# Altium PCB PCB3.PcbDoc
Units mm, origin at the board's own origin, x right, y up, seen from the top; angles counter-clockwise.
Board outline 147.7 x 93.98 mm, 2 copper layers (Top Layer, Bottom Layer); 30 components, 28 nets, 230 pads, 38 vias.
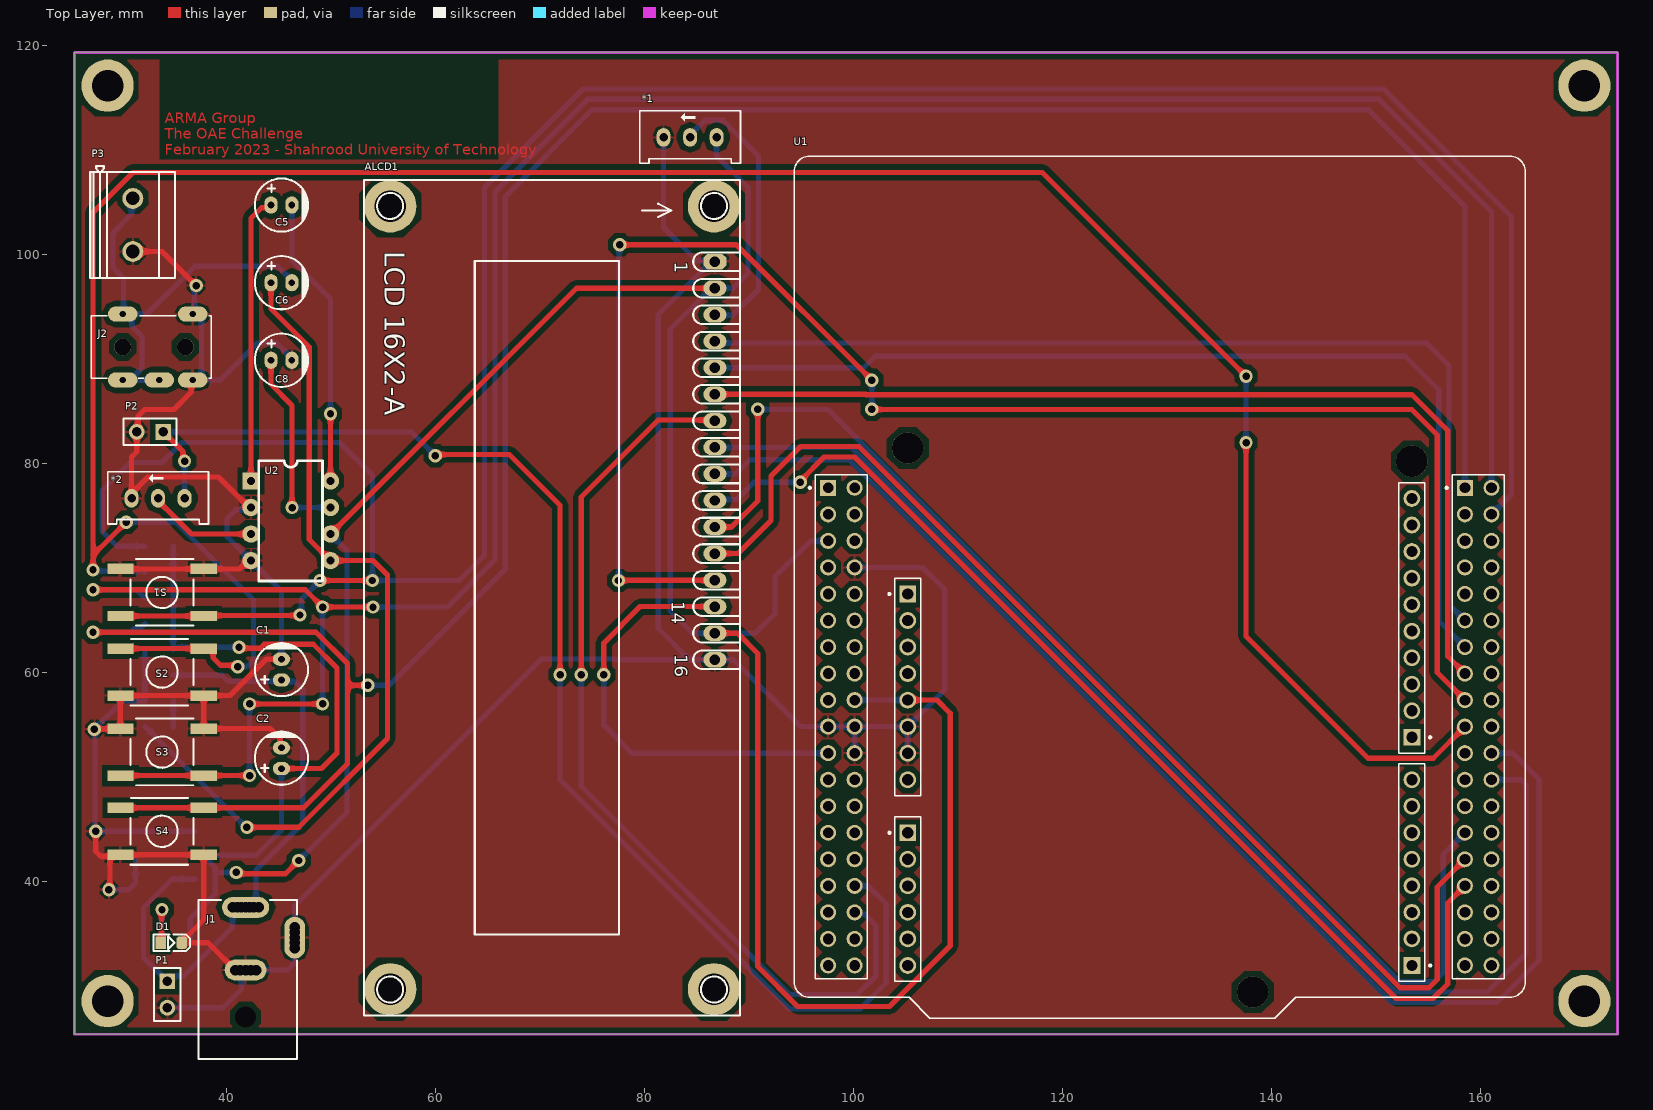
[diagram p0: Top Layer view]
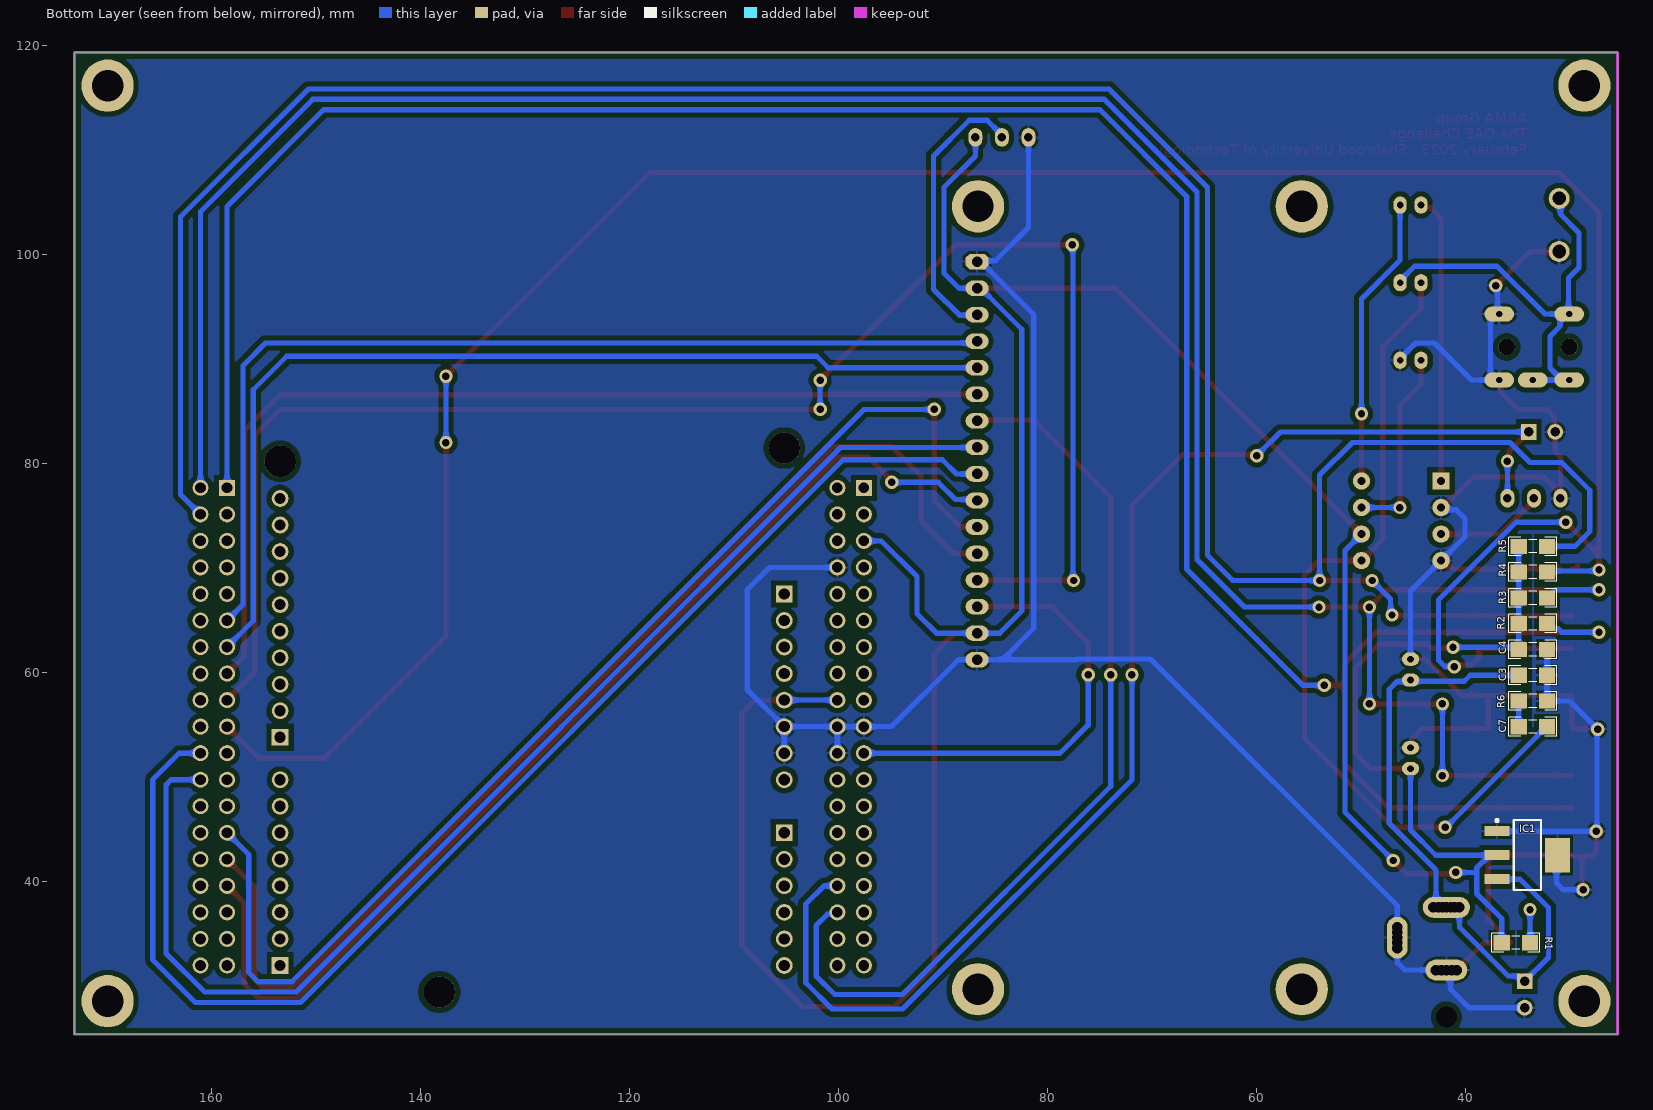
[diagram p1: Bottom Layer view, seen from below]
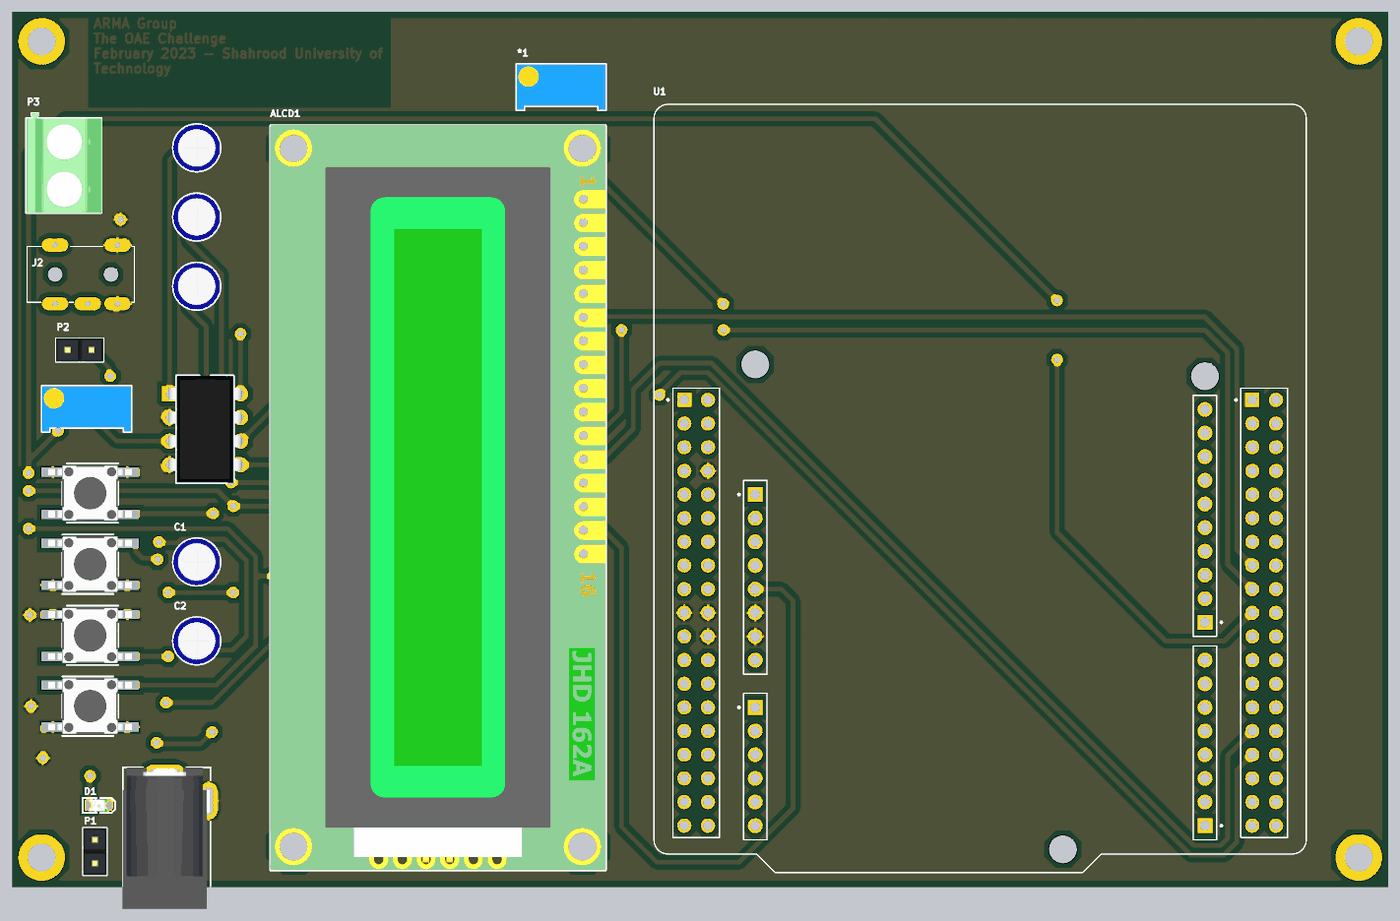
[diagram p2: 3D render of the assembled board from above, using the file's embedded part models]
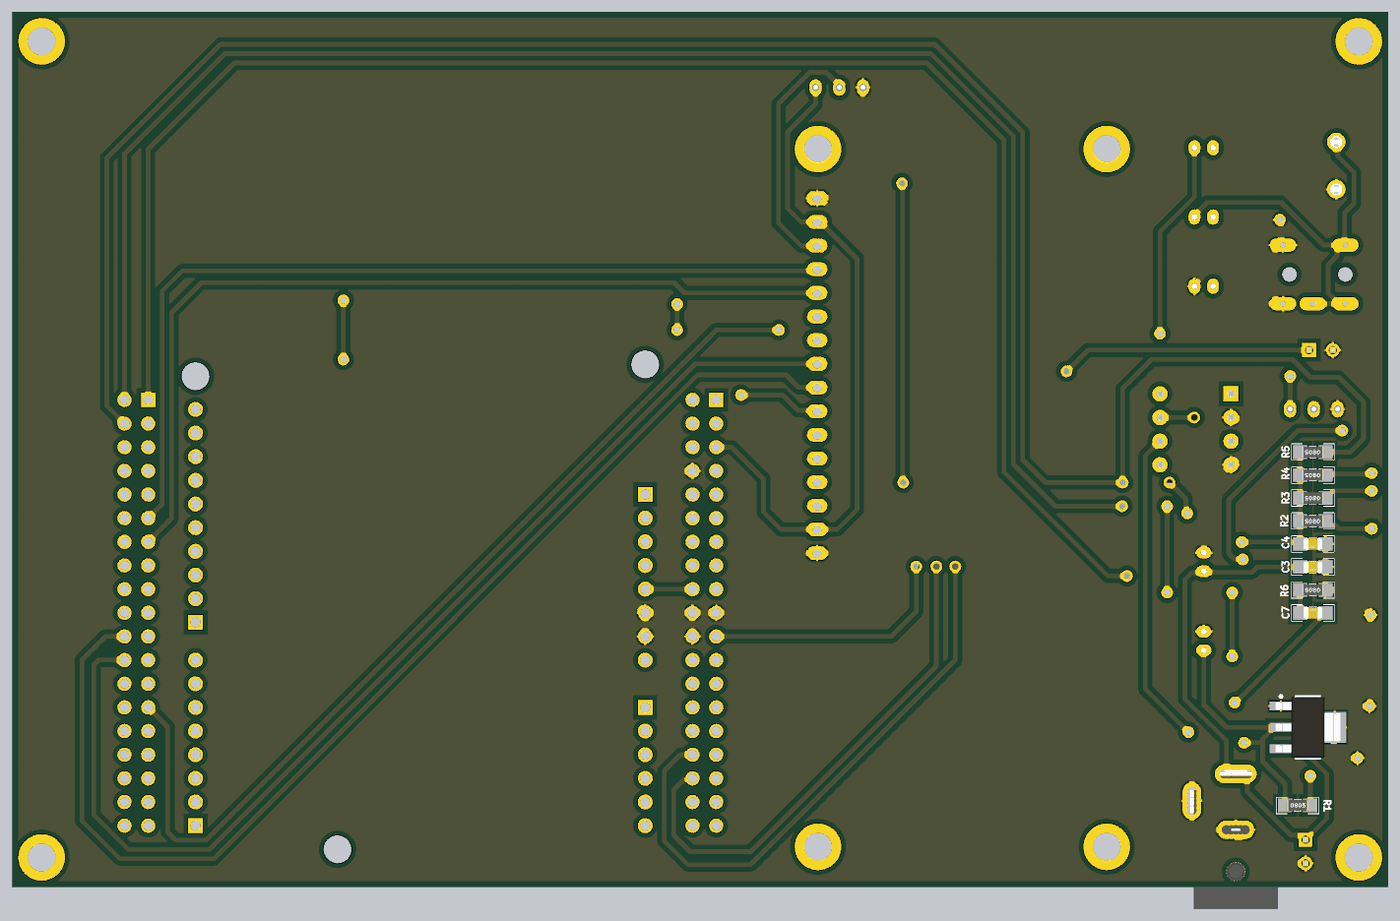
[diagram p3: 3D render of the assembled board from below, using the file's embedded part models]

## Layer stack, top to bottom
Top Solder: solder mask 0.0102, Solder Resist, Dk 3.5
Top Layer: signal copper 0.0356
Dielectric 1: dielectric 0.32, FR-4, Dk 4.8
Bottom Layer: signal copper 0.0356
Bottom Solder: solder mask 0.0102, Solder Resist, Dk 3.5

## Board outline
25.4,25.4 173.101,25.4 173.101,119.38 25.4,119.38

## Design rules (kind name [scope] priority, off if disabled: settings)
Clearance [All] p1: gap=0.5 ignorepadtopadclearanceinfootprint=FALSE
PolygonConnect [All] p1: connectstyle=Relief reliefconductorwidth=0.254 reliefentries=4 polygonreliefangle="90 Angle" airgapwidth=0.254
RoutingVias [All] p1: holewidth=0.711 width=1.27 viastyle="Through Hole" minholewidth=0.711 minwidth=1.27 maxholewidth=0.711 maxwidth=1.27
SolderMaskExpansion [All] p1: expansion=0.102 istentingtop=FALSE
Width [All] p1: maxlimit=0.6 minlimit=0.5 preferedwidth=0.5
30 further rules are at their usual default settings.

## Components (designator, comment, footprint, x,y, rotation, side; value= is the part's Value field where it differs from the comment)
*1 "RES_POT_LIN 10K" 3296W 84.328,111.252 r180 top
*2 "RES_POT_LIN 10K" 3296W 33.401,76.708 r180 top
ALCD1 "LCD" "LCD_2X16 GREEN10mm" 70.401,69.892 r270 top
C1 "100uF" "cap 01" 45.212,60.309 r270 top
C2 "100uF" "cap 01" 45.212,51.832 r270 top
C3 "100nF" CAPC3413X12N 33.506,59.77 r0 bottom
C4 "100nF" CAPC3413X12N 33.506,62.237 r0 bottom
C5 "10uF" "cap 01" 45.212,104.775 r180 top
C6 "250uF" "cap 01" 45.212,97.346 r180 top
C7 "0.05uF or 100nF" CAPC3413X12N 33.506,54.835 r180 bottom
C8 "10uF" "cap 01" 45.212,89.916 r180 top
D1 "LED805GRN" LED0805GRN 34.671,34.163 r0 top
IC1 "IC_AMS1117" SOT223-4N 34.036,42.545 r180 bottom
J1 "Power Jack" "Power Jack" 41.783,23.051 r90 top
J2 "PJ-313" PJ-313 32.766,91.186 r180 top
P1 "Header 2" HDR1X2 34.29,30.48 r270 top
P2 "Header 2" HDR1X2 33.909,83.058 r180 top
P3 "Header 2" CON_MKDSN1,5/2-5,08 30.988,102.87 r270 top
R1 "1K" RESC3413X04N 35.139,34.163 r180 bottom
R2 "10K" RESC3413X04N 33.506,64.705 r0 bottom
R3 "10K" RESC3413X04N 33.506,67.172 r0 bottom
R4 "10K" RESC3413X04N 33.506,69.64 r0 bottom
R5 "10K" RESC3413X04N 33.506,72.107 r0 bottom
R6 "10" RESC3413X04N 33.506,57.303 r0 bottom
S1 "Switch PB" SW-PB 33.782,67.691 r180 top
S2 "Switch PB" SW-PB 33.782,60.071 r0 top
S3 "Switch PB" SW-PB 33.782,52.415 r180 top
S4 "Switch PB" SW-PB 33.782,44.831 r0 top
U1 "NUCLEO-F446RE" MODULE_NUCLEO-F446RE 129.286,68.199 r0 top
U2 "LM386" DIP8 42.291,78.359 r0 top

## Footprints (in the part's own frame and the unit in brackets; to place one, negate y for a bottom-side part, rotate by r counter-clockwise, add the part's x,y. Pads: shape width x height; smd on the part's side, far side on the other; paste and mask are expansions set on the pad)
3296W [mil]
  oval 52x70 hole 32: 1(-100,0) 2(0,0) 3(100,0)
  silkscreen extent -190,-100 190,97, body extent -187,-96 188,94, height 455
"cap 01" [mm]
  oval 1.27x1.651 hole 0.635: 1(1,0) 2(-1,0)
  silkscreen extent -2.55,-2.55 2.55,2.55, body extent -2.53,-2.53 2.53,2.53, height 12.54
CAPC3413X12N [mm] "Chip Capacitor, 2-Leads, Body 3/40x1/30mm, IPC Medium Density-Design:Abbas Basereh"
  rect 1.55x1.45 smd: 1(-1.35,0) 2(1.35,0)
  silkscreen extent -2.29,-0.89 2.29,0.89, body extent -1,-0.63 1,0.62, height 0.78
CON_MKDSN1,5/2-5,08 [mm]
  round 2 hole 1.3: 1(-2.54,0) 2(2.54,0)
  silkscreen extent -5.65,-4.07 5.08,4.03, body extent -5.64,-4.05 5.09,4.05, height 10.03
DIP8 [mil]
  rect 65x65 hole 30: 1(0,0)
  round 65 hole 30: 2(0,-100) 3(0,-200) 4(0,-300) 5(300,-300) 6(300,-200) 7(300,-100) 8(300,0)
  silkscreen extent 30,-377 270,77, body extent -5,-375 305,75, height 165
HDR1X2 [mm] "Connector; Header; 2 Position"
  rect 1.5x1.5 hole 0.9: 1(0,0)
  round 1.5 hole 0.9: 2(2.54,0)
  silkscreen extent -1.27,-1.27 3.81,1.27, body extent -1.27,-1.28 3.81,1.26, height 8.79
"LCD_2X16 GREEN10mm" [mm] "LCD 2x16 Alphanumberic-Designer Abbas Basereh"
  oct 1.5x2.2 hole 1: 1(-29.464,16.3)
  oval 1.5x2.2 hole 1: 2(-26.924,16.3) 3(-24.384,16.3) 4(-21.844,16.3) 5(-19.304,16.3) 6(-16.764,16.3) 7(-14.224,16.3) 8(-11.684,16.3) 9(-9.144,16.3) 10(-6.604,16.3) 11(-4.064,16.3) 12(-1.524,16.3) 13(1.016,16.3) 14(3.556,16.3) 15(6.096,16.3) 16(8.636,16.3)
  round 5 hole 3: ""(-34.756,16.213) ""(-34.756,-14.775) ""(40.174,16.213) ""(40.174,-14.775)
  silkscreen extent -37.3,-17.29 42.7,18.71, body extent -37.35,-17.4 42.8,18.8, height 20.6
LED0805GRN [mm] "LED SMD 0805, GREEN"
  rect 1x1.2 smd paste-2 mask+0.075: 1(-1,0)
  rrect50% 1x1.2 smd paste-2 mask+0.075: 2(1,0)
  Top Layer pour cut-out: -0.5,0.8 0.5,0.8 0.5,-0.8 -0.5,-0.8
  silkscreen extent -1.7,-0.8 1.8,0.8, body extent -1,-0.63 1,0.63, height 0.7
MODULE_NUCLEO-F446RE [mm]
  rect 1.605x1.605 hole 1.07: CN5_1(24.13,-14.37) CN6_1(-24.13,-0.65) CN8_1(-24.13,-23.51) CN9_1(24.13,-36.21)
  round 1.605 hole 1.07: CN5_2(24.13,-11.83) CN5_3(24.13,-9.29) CN5_4(24.13,-6.75) CN5_5(24.13,-4.21) CN5_6(24.13,-1.67) CN5_7(24.13,0.87) CN5_8(24.13,3.41) CN5_9(24.13,5.95) CN5_10(24.13,8.49) CN6_2(-24.13,-3.19) CN6_3(-24.13,-5.73) CN6_4(-24.13,-8.27) CN6_5(-24.13,-10.81) CN6_6(-24.13,-13.35) CN6_7(-24.13,-15.89) CN6_8(-24.13,-18.43) CN8_2(-24.13,-26.05) CN8_3(-24.13,-28.59) CN8_4(-24.13,-31.13) CN8_5(-24.13,-33.67) CN8_6(-24.13,-36.21) CN9_2(24.13,-33.67) CN9_3(24.13,-31.13) CN9_4(24.13,-28.59) CN9_5(24.13,-26.05) CN9_6(24.13,-23.51) CN9_7(24.13,-20.97) CN9_8(24.13,-18.43)
  rect 1.53x1.53 hole 1.02: CN7_1(-31.75,9.51) CN10_1(29.21,9.51)
  round 1.53 hole 1.02: CN7_2(-29.21,9.51) CN7_3(-31.75,6.97) CN7_4(-29.21,6.97) CN7_5(-31.75,4.43) CN7_6(-29.21,4.43) CN7_7(-31.75,1.89) CN7_8(-29.21,1.89) CN7_9(-31.75,-0.65) CN7_10(-29.21,-0.65) CN7_11(-31.75,-3.19) CN7_12(-29.21,-3.19) CN7_13(-31.75,-5.73) CN7_14(-29.21,-5.73) CN7_15(-31.75,-8.27) CN7_16(-29.21,-8.27) CN7_17(-31.75,-10.81) CN7_18(-29.21,-10.81) CN7_19(-31.75,-13.35) CN7_20(-29.21,-13.35) CN7_21(-31.75,-15.89) CN7_22(-29.21,-15.89) CN7_23(-31.75,-18.43) CN7_24(-29.21,-18.43) CN7_25(-31.75,-20.97) CN7_26(-29.21,-20.97) CN7_27(-31.75,-23.51) CN7_28(-29.21,-23.51) CN7_29(-31.75,-26.05) CN7_30(-29.21,-26.05) CN7_31(-31.75,-28.59) CN7_32(-29.21,-28.59) CN7_33(-31.75,-31.13) CN7_34(-29.21,-31.13) CN7_35(-31.75,-33.67) CN7_36(-29.21,-33.67) CN7_37(-31.75,-36.21) CN7_38(-29.21,-36.21) CN10_2(31.75,9.51) CN10_3(29.21,6.97) CN10_4(31.75,6.97) CN10_5(29.21,4.43) CN10_6(31.75,4.43) CN10_7(29.21,1.89) CN10_8(31.75,1.89) CN10_9(29.21,-0.65) CN10_10(31.75,-0.65) CN10_11(29.21,-3.19) CN10_12(31.75,-3.19) CN10_13(29.21,-5.73) CN10_14(31.75,-5.73) CN10_15(29.21,-8.27) CN10_16(31.75,-8.27) CN10_17(29.21,-10.81) CN10_18(31.75,-10.81) CN10_19(29.21,-13.35) CN10_20(31.75,-13.35) CN10_21(29.21,-15.89) CN10_22(31.75,-15.89) CN10_23(29.21,-18.43) CN10_24(31.75,-18.43) CN10_25(29.21,-20.97) CN10_26(31.75,-20.97) CN10_27(29.21,-23.51) CN10_28(31.75,-23.51) CN10_29(29.21,-26.05) CN10_30(31.75,-26.05) CN10_31(29.21,-28.59) CN10_32(31.75,-28.59) CN10_33(29.21,-31.13) CN10_34(31.75,-31.13) CN10_35(29.21,-33.67) CN10_36(31.75,-33.67) CN10_37(29.21,-36.21) CN10_38(31.75,-36.21)
  round 3 hole 3 unplated: ""(-24.13,13.32) ""(8.89,-38.75) ""(24.13,12.05)
  silkscreen extent -35,-41.25 35,41.25
PJ-313 [mm]
  oval 2.845x1.422 hole 0.6: 2_1(-3.95,3.15) 2_2(-3.95,-3.15) 3(-0.75,3.15) 4_1(2.75,3.15) 4_2(2.75,-3.15)
  round 1.6 hole 1.6 unplated: ""(-3.25,0) ""(2.75,0)
  silkscreen extent -5.75,-3 5.75,3
"Power Jack" [mm] "Power Adaptor Jack"
  round 1.5 hole 1: 1(14.5,-1.25) 1(14.5,-0.8) 1(14.5,-0.4) 1(14.5,0.4) 1(14.5,0.8) 1(14.5,1.25) 2(8.5,-1) 2(8.5,1) 2(8.5,-0.5) 2(8.5,0.5) 3(10.6,-4.7) 3(11.1,-4.7) 3(12.1,-4.7) 3(12.6,-4.7)
  oval 2x4.5 hole 1: 1(14.5,0)
  oval 2x4 hole 1: 2(8.5,0)
  oval 4x2 hole 1: 3(11.6,-4.7)
  round 1.9 hole 2: MH(4,0)
  silkscreen extent 0,-4.9 15.2,4.5, body extent 0,-4.9 15.2,4.5, height 11
RESC3413X04N [mm] "Chip Resistor, 2-Leads, Body 3/40x1/30mm, IPC Medium Density-Design:Abbas Basereh"
  rect 1.55x1.45 smd: 1(-1.35,0) 2(1.35,0)
  silkscreen extent -2.29,-0.89 2.29,0.89, body extent -1.25,-0.62 1.25,0.62, height 0.79
SOT223-4N [mm] "SOT223, 4-Leads, Body 6.7x7.3mm (max), Pitch 2.30mm, IPC Medium Density"
  rect 2.4x0.95 smd: 1(-2.9,2.3) 2(-2.9,0) 3(-2.9,-2.3)
  rect 2.4x3.3 smd: 4(2.9,0)
  silkscreen extent -3.03,-3.35 1.3,3.45, body extent -3.48,-3.25 3.48,3.25, height 1.68
SW-PB [mm] "SWITCH, PUSHBUTTON, THD, SPST, 6X6X9.5 mm ; 200,000 cycles ; 0.98N Force, SKQKAJD010"
  rect 2.5x1 smd: 1(-3.992,2.25) 1(3.992,2.25) 2(-3.992,-2.25) 2(3.992,-2.25)
  silkscreen extent -3,-3.2 3,3.18, body extent -4.5,-3 4.5,3, height 5

## Part data
*1 *2: library part RES_POT_LIN
ALCD1: "Alphanumic LCD", Data=16-12-2016, Designer="Abbas Basereh"
C1 C2 C5 C6 C8: library part Cap-Polar, "Polar Capacitor", Voltage=16V, Adding Date=1387/12/20, Designer="Saeid Jorablo", Organazation=ControTec
C3 C4 C7: library part "CAP SMD 0805", "CAP 0805", Data=16-12-2016, Desc.="CAP SMD 0805", Designer="Abbas Basereh"
D1: library part LED_SMD_0805_GRN, "LED, SMD, 0805, GREEN", ASSEMBLY=ASSEMBLY, DESC=DESCRIPTION, MANF=-, MANF_P#=-, PARAM=20mA, PARAM2=2.2V, PRICE=36t@Javan
IC1: "800mA LOW DROPOUT VOLTAGE REGULATOR", Manufacturer="Advanced Monolithic Systems, Inc.", Operating Temperature="-55 ~ +125 (C)", Category="Integrated Circuit", Code_IPC=SOT-223, Company="SJ Libraries", ComponentLink1Description=Datasheet, ComponentLink1URL=http://www.advanced-monolithic.com/pdf/ds1117.pdf, ComponentLink2Description=Reference, ComponentLink2URL=http://www.advanced-monolithic.com/index.html, Designer="Eng. Saeid Jorablo", ESD Sensetive=True/False, HelpURL=http://s3.picofile.com/file/7443264187/Coming_Soon_logo.gif, Mounting Technology="Surface Mount", PackageDescription="SOT223, 4-Leads, Body 6.7x7.3mm (max), Pitch 2.30mm", PinCount=4, RoHS compliant=True/False, Status=Unrelease, Update=6/5/2012
J2: "DC DC Converter Output Input", Package=None, Availability=Unavailable, MF="ADC Telecommunications", MP=PJ313, PRICE=None, SnapEDA_Link=https://www.snapeda.com/parts/PJ313/ADC%20Telecommunications/view-part/423792/?ref=snap
P1 P2 P3: "Header, 2-Pin", LatestRevisionDate=17-Jul-2002, LatestRevisionNote="Re-released for DXP Platform.", Publisher="Altium Limited"
R1 R2 R3 R4 R5 R6: library part "RES 0805 0.125W", "RES 0805", Data=16-12-2016, Desc.="RES SMD 0805", Designer="Abbas Basereh"
S1 S2 S3 S4: "Push Button Switch"
U1: "STM32 Nucleo-64 development board with STM32F446RET6 MCU, supports Arduino and ST morpho connectivity", Package=None, Availability=Unavailable, MP=NUCLEO-F446RE, PRICE=None
U2: library part LM386_DIP8, "AMP, Audio, Low Voltage, Power Amp", MANF="Texas Instruments", MANF_P#=LM386N-1
J1: Adding Date=10/21/2009, Company=Personal, Designer="Saeid Jorablo", Project Name=Laser

## Free pads (board coordinates)
  round 5 hole 3: 1(28.575,28.575) 1(28.575,116.205) 1(169.926,28.575) 1(169.926,116.205)

## Via types
v1: diameter 1.27, hole 0.711, Top Layer to Bottom Layer, 38 vias

## Nets (pads, with @x,y where several pads share a name; then routed paths per layer and width w, separated by ;. In a path a pad name is that pad's centre, name@x,y a point inside that pad or via, vN(x,y) a via of type N, cw(c..) or ccw(c..) an arc to the next point about the centre after c; other vN are vias at no path point)
GND: *1.3 *2.3 ALCD1.1 ALCD1.16 C1.2 C2.2 C3.1 C4.1 C8.2 D1.2 IC1.1 IC1.4 J1.2 J1.3 J2.2_1 J2.2_2 P1.2 P2.2 P3.2 R6.1 S1.2 S2.2 S3.2 S4.2 U1.CN6_6 U1.CN6_7 U1.CN7_8 U1.CN7_19 U1.CN7_20 U1.CN7_22 U2.2 U2.4 | length 366.8
  Top Layer w0.5: v1(27.305,54.61) 27.332,54.637 29.762,54.637 29.79,54.664 29.79,57.821 S2.2@37.774,57.821 ; v1(27.432,44.831) 27.432,42.926 27.94,42.418 S4.2@28.877,42.418 ; v1(28.702,39.243) 28.79,39.331 28.79,42.331 S4.2@28.877,42.418 ; S1.2@29.21,70.191 29.46,69.941 S1.2@29.79,69.941 ; S1.2@30.861,69.941 37.774,69.941 41.182,69.941 41.98,70.739 U2.4 ; *2.3 *2.3@30.861,77.159 ; P3.2 33.782,100.33 v1(37.047,97.065) ; P2.2 31.369,81.153 30.861,80.645 *2.3@30.861,77.159 ; P2.2@31.472,83.161 31.472,84.558 32.131,85.217 34.925,85.217 36.576,86.868 36.576,87.896 J2.2_1 ; J1.2@41.783,31.551 40.783,31.551 38.171,34.163 D1.2 35.671,34.263 37.774,36.366 37.774,42.581 29.79,42.581 29.626,42.418 S4.2@28.877,42.418 ; U2.2 42.119,75.819 39.198,78.74 32.424,78.74 31.725,78.041 31.725,78.023 *2.3@30.861,77.159 ; C2.2 45.085,52.959 45.085,53.721 44.142,54.664 37.774,54.664 S2.2@37.774,57.821 ; C1.2 43.783,61.309 40.295,57.821 S2.2@37.774,57.821
  Bottom Layer w0.5: v1(28.702,39.243) 30.607,39.243 31.242,39.878 31.242,42.439 IC1.4 ; C4.1 C3.1 R6.1 29.998,57.303 v1(27.305,54.61) 27.368,54.546 27.368,44.895 v1(27.432,44.831) 27.439,44.838 36.929,44.838 IC1.1 ; P1.2 39.624,27.94 41.402,29.718 41.402,31.17 41.783,31.551 42.783,31.551 45.775,31.551 46.483,32.259 J1.3@46.483,33.651 ; J2.2_1 J2.2_1@37.14,88.036 ; v1(37.047,97.065) 36.9,96.917 36.9,94.52 J2.2_2 37.14,94.336 37.566,93.91 37.566,88.462 J2.2_1@37.14,88.036 ; U2.2 42.071,75.599 40.84,75.599 40.005,74.764 40.005,73.025 U2.4 45.212,67.818 C1.2 ; C8.2 46.212,90.106 44.752,91.567 42.917,91.567 39.386,88.036 J2.2_1@37.14,88.036 ; J1.3@46.483,34.651 46.483,35.151 46.483,35.651 46.483,37.72 70.092,61.329 77.153,61.329 77.226,61.256 84.286,61.256 ; *1.3 81.788,102.616 84.963,99.441 86.351,99.441 86.616,99.441 ALCD1.1 ; ALCD1.1@86.351,99.356 81.28,94.285 81.28,64.262 84.286,61.256 ; U1.CN7_22 U1.CN7_20 ; U1.CN7_8 106.568,70.089 108.712,67.945 108.712,58.405 U1.CN6_6 ; U1.CN6_7 U1.CN6_6 ; 84.286,61.256 ALCD1.16 88.477,61.256 94.884,54.849 97.14,54.849 97.282,54.991 97.394,54.991 U1.CN7_19 U1.CN7_20 ; U1.CN7_20 U1.CN6_6
Net*1_2: *1.2 ALCD1.3 | length 26.9
  Bottom Layer w0.5: *1.2 84.328,111.481 85.738,112.891 87.452,112.891 90.864,109.479 90.864,96.706 88.392,94.234 86.743,94.234 ALCD1.3 ALCD1.3@86.616,94.361
Net*2_2: *2.2 U2.3 | length 10.4
  Top Layer w0.5: *2.2 33.401,76.479 36.601,73.279 U2.3
NetC5_1: C5.1 U2.1 | length 27.6
  Top Layer w0.5: U2.1 42.291,103.505 43.307,104.521 43.958,104.521 C5.1
NetC5_2: C5.2 U2.8 | length 27.9
  Top Layer w0.5: U2.8 v1(49.911,84.808)
  Bottom Layer w0.5: C5.2 46.212,99.495 49.911,95.796 v1(49.911,84.808)
NetC6_1: C6.1 C7.2 U2.5 | length 81.3
  Top Layer w0.5: v1(41.91,45.212) 46.863,45.212 55.36,53.709 55.36,69.352 53.973,70.739 U2.5 47.879,72.771 47.879,91.186 44.212,94.853 C6.1
  Bottom Layer w0.5: C7.2 32.206,54.835 41.829,45.212 v1(41.91,45.212)
NetC6_2: C6.2 J2.3 J2.4_1 J2.4_2 P3.1 | length 42
  Bottom Layer w0.5: J2.4_1 J2.4_1@30.727,88.036 ; P3.1 30.861,105.283 30.861,103.886 29.083,102.108 29.083,98.806 30.099,97.79 30.099,94.419 J2.4_2 J2.4_2@30.478,94.336 ; J2.3 J2.4_1@30.727,88.036 ; C6.2 46.212,97.536 44.827,98.921 36.945,98.921 32.36,94.336 J2.4_2@30.478,94.336 ; J2.4_2@30.478,94.336 30.904,93.91 30.904,93.175 31.877,92.202 31.877,89.186 J2.4_1@30.727,88.036
NetC7_1: C7.1 R6.2 | length 2.5
  Bottom Layer w0.5: C7.1 R6.2
NetC8_1: C8.1 U2.7 | length 18.6
  Top Layer w0.5: C8.1 44.212,87.614 46.228,85.598 v1(46.228,75.819)
  Bottom Layer w0.5: v1(46.228,75.819) U2.7
NetD1_1: D1.1 R1.2 | length 6.4
  Top Layer w0.5: D1.1 33.727,34.219 33.727,37.283 v1(33.782,37.338)
  Bottom Layer w0.5: v1(33.782,37.338) 33.782,34.17 R1.2
PA4-SIN: *2.1 P2.1 U1.CN7_32 | length 127.1
  Top Layer w0.5: P2.1 35.794,81.173 35.794,80.411 v1(35.941,80.264) ; v1(59.944,80.772) 60.071,80.899 67.023,80.899 71.882,76.04 v1(71.882,59.817)
  Bottom Layer w0.5: P2.1 57.658,83.058 v1(59.944,80.772) ; *2.1 v1(35.941,80.264) ; v1(71.882,59.817) 71.882,49.767 93.836,27.813 100.584,27.813 103.108,30.337 103.108,37.862 101.361,39.609 U1.CN7_32
PA5: ALCD1.4 U1.CN10_11 | length 96.3
  Bottom Layer w0.5: ALCD1.4 86.87,91.567 154.813,91.567 156.981,89.399 156.981,66.524 U1.CN10_11
PA6: ALCD1.5 U1.CN10_13 | length 96.7
  Bottom Layer w0.5: ALCD1.5 100.953,89.196 102.054,90.297 152.782,90.297 155.981,87.098 155.981,64.984 U1.CN10_13
PA7: ALCD1.6 U1.CN10_15 | length 95.5
  Top Layer w0.5: ALCD1.6 101.123,86.656 101.153,86.626 153.404,86.626 156.845,83.185 156.845,61.58 U1.CN10_15
PB0: ALCD1.7 U1.CN7_34 | length 88.1
  Top Layer w0.5: v1(73.914,59.817) 73.914,76.835 81.28,84.201 86.616,84.201 ALCD1.7
  Bottom Layer w0.5: v1(73.914,59.817) 73.914,49.149 93.853,29.21 100.33,29.21 102.108,30.988 102.108,35.814 101.036,36.886 100.259,36.886 U1.CN7_34
PB1: ALCD1.8 U1.CN10_24 | length 120.4
  Bottom Layer w0.5: ALCD1.8 99.766,81.576 126.505,54.836 126.505,54.82 151.889,29.437 160.626,29.437 164.338,33.148 164.338,49.276 163.845,49.769 U1.CN10_24
PB2: ALCD1.9 U1.CN10_22 | length 125.6
  Bottom Layer w0.5: ALCD1.9 88.688,79.036 90.043,80.391 99.537,80.391 125.505,54.422 125.505,54.405 151.474,28.437 161.533,28.437 165.608,32.512 165.608,49.784 163.083,52.309 U1.CN10_22
PB3: ALCD1.10 U1.CN10_31 | length 104
  Top Layer w0.5: v1(94.869,78.232) 94.869,78.359 97.155,80.645 100.076,80.645 151.892,28.829 155.448,28.829 156.845,30.226 156.845,37.958 U1.CN10_31
  Bottom Layer w0.5: ALCD1.10 86.786,76.581 88.773,76.581 90.424,78.232 v1(94.869,78.232)
PB4: ALCD1.11 U1.CN10_27 | length 116.8
  Top Layer w0.5: ALCD1.11 88.307,73.956 90.805,76.454 v1(90.805,85.217)
  Bottom Layer w0.5: v1(90.805,85.217) 97.539,85.217 127.505,55.25 127.505,55.234 152.303,30.437 155.532,30.437 156.414,31.319 156.414,42.607 U1.CN10_27
PB5: ALCD1.12 U1.CN10_29 | length 110.3
  Top Layer w0.5: ALCD1.12 88.9,71.416 92.075,74.591 92.075,78.828 94.908,81.661 100.474,81.661 152.282,29.854 155.058,29.854 155.845,30.64 155.845,39.498 U1.CN10_29
PB6: ALCD1.13 U1.CN10_17 | length 155.3
  Top Layer w0.5: v1(77.47,68.834) 77.491,68.855 86.68,68.855 ALCD1.13 ; v1(77.597,100.965) 88.773,100.965 v1(101.727,88.011) ; v1(101.727,85.217) 101.736,85.208 153.407,85.208 155.845,82.771 155.845,60.04 U1.CN10_17
  Bottom Layer w0.5: v1(77.47,68.834) 77.534,68.897 77.534,100.901 v1(77.597,100.965) ; v1(101.727,85.217) v1(101.727,88.011)
PB7: ALCD1.14 U1.CN7_21 | length 42.5
  Top Layer w0.5: v1(76.073,59.817) 76.073,62.865 79.544,66.336 ALCD1.14
  Bottom Layer w0.5: v1(76.073,59.817) 76.073,54.991 78.755,52.309 U1.CN7_21
PC6: R5.1 S1.1 U1.CN10_4 | length 257.6
  Top Layer w0.5: S1.1@29.79,65.441 37.774,65.441 37.82,65.486 46.944,65.486 v1(46.99,65.532) ; v1(48.895,68.834) v1(53.919,68.834)
  Bottom Layer w0.5: R5.1 29.493,72.107 28.067,73.533 28.067,77.47 30.734,80.137 33.782,80.137 35.703,82.058 50.784,82.058 53.919,78.923 v1(53.919,68.834) 62.23,68.834 64.643,71.247 64.643,106.443 74.091,115.891 150.699,115.891 162.941,103.649 162.941,77.074 U1.CN10_4 ; v1(46.99,65.532) 47.137,65.679 47.137,67.076 v1(48.895,68.834)
PC7: R4.1 S2.1 U1.CN10_19 | length 251
  Top Layer w0.5: v1(27.178,69.85) 27.178,71.247 ; S2.1@29.79,62.321 38.43,62.321 38.68,62.071 38.68,61.416 39.369,60.726 40.874,60.726 v1(41.021,60.579) ; v1(30.353,74.422) 27.178,71.247 ; v1(137.541,82.042) 137.541,63.5 149.225,51.816 155.463,51.816 U1.CN10_19 ; v1(137.541,88.392) 118.035,107.898 31.001,107.898 27.178,104.075 27.178,71.247
  Bottom Layer w0.5: v1(27.178,69.85) 27.283,69.745 32.051,69.745 R4.1 R4.1@32.112,69.596 ; v1(30.353,74.422) 35.101,74.422 42.533,66.99 42.533,61.202 41.945,60.614 41.056,60.614 v1(41.021,60.579) ; v1(137.541,82.042) v1(137.541,88.392)
PC8: R3.1 S3.1 U1.CN10_2 | length 247
  Top Layer w0.5: v1(27.178,67.945) 47.498,67.945 v1(49.149,66.294) v1(53.975,66.294) ; S3.1@29.79,50.164 37.774,50.164 v1(42.164,50.165) ; v1(42.164,57.023) v1(49.149,57.023)
  Bottom Layer w0.5: v1(27.178,67.945) 31.333,67.945 32.106,67.172 R3.1 ; v1(42.164,50.165) v1(42.164,57.023) ; v1(49.149,57.023) v1(49.149,66.294) ; v1(53.975,66.294) 61.104,66.294 65.643,70.833 65.643,106.029 74.505,114.891 150.285,114.891 161.036,104.14 U1.CN10_2
PC9: R2.1 S4.1 U1.CN10_1 | length 245.4
  Top Layer w0.5: v1(27.178,63.881) 48.531,63.881 51.534,60.878 51.534,58.801 ; S4.1@29.79,47.081 47.318,47.081 51.534,51.297 51.534,58.801 ; v1(53.467,58.801) 51.534,58.801
  Bottom Layer w0.5: v1(27.178,63.881) 30.734,63.881 31.083,64.23 31.681,64.23 R2.1 ; v1(53.467,58.801) 55.499,58.801 66.643,69.945 66.643,105.584 74.949,113.891 149.253,113.891 158.496,104.648 U1.CN10_1
VCC: *1.1 ALCD1.2 ALCD1.15 C2.1 C4.2 IC1.2 R1.1 R2.2 R3.2 R4.2 R5.2 U1.CN6_5 U1.CN7_5 U1.CN7_18 U2.6 | length 316.9
  Top Layer w0.5: v1(40.894,40.894) 41.021,40.767 45.593,40.767 v1(46.863,42.037) ; v1(41.148,62.445) 41.24,62.353 43.176,62.353 43.561,62.738 48.26,62.738 50.534,60.464 50.534,52.312 49.054,50.832 C2.1 ; U2.6 73.448,96.816 ALCD1.2 ; ALCD1.15 88.858,63.796 90.805,61.849 90.805,31.877 94.615,28.067 103.43,28.067 109.22,33.857 109.22,56.134 107.965,57.389 U1.CN6_5
  Bottom Layer w0.5: R5.2 R4.2 R3.2 R2.2 C4.2 35.064,62.445 v1(41.148,62.445) ; R1.1 36.489,36.489 38.886,38.886 38.886,40.894 ; IC1.2 IC1.2@37.661,42.545 ; v1(40.894,40.894) 38.886,40.894 ; C2.1 45.212,44.958 42.799,42.545 IC1.2@37.661,42.545 ; v1(46.863,42.037) 51.486,46.66 51.486,71.704 U2.6 ; *1.1 86.868,109.474 89.864,106.478 89.864,98.246 88.434,96.816 ALCD1.2 86.351,96.816 82.423,92.888 82.423,65.913 84.54,63.796 ALCD1.15 90.593,63.796 92.456,65.659 92.456,69.215 95.87,72.629 U1.CN7_5 U1.CN7_5@97.339,72.432 ; U1.CN7_18 U1.CN6_5 ; IC1.2@37.661,42.545 38.886,41.32 38.886,40.894
Vi: C1.1 C3.2 IC1.3 J1.1 P1.1 | length 60.7
  Bottom Layer w0.5: C3.2 39.498,59.77 40.074,59.194 45.097,59.194 C1.1 45.359,59.162 46.502,59.162 47.244,58.42 47.244,45.576 42.783,41.115 42.783,38.244 42.09,37.551 J1.1@41.783,37.551 ; IC1.3 34.73,40.245 32.004,37.519 32.004,32.766 P1.1 34.79,30.98 35.866,30.98 40.533,35.647 J1.1@40.533,37.551
pads on no net: ALCD1. J1.MH J2. U1. U1.CN5_1 U1.CN5_2 U1.CN5_3 U1.CN5_4 U1.CN5_5 U1.CN5_6 U1.CN5_7 U1.CN5_8 U1.CN5_9 U1.CN5_10 U1.CN6_1 U1.CN6_2 U1.CN6_3 U1.CN6_4 U1.CN6_8 U1.CN7_1 U1.CN7_2 U1.CN7_3 U1.CN7_4 U1.CN7_6 U1.CN7_7 U1.CN7_9 U1.CN7_10 U1.CN7_11 U1.CN7_12 U1.CN7_13 U1.CN7_14 U1.CN7_15 U1.CN7_16 U1.CN7_17 U1.CN7_23 U1.CN7_24 U1.CN7_25 U1.CN7_26 U1.CN7_27 U1.CN7_28 U1.CN7_29 U1.CN7_30 U1.CN7_31 U1.CN7_33 U1.CN7_35 U1.CN7_36 U1.CN7_37 U1.CN7_38 U1.CN8_1 U1.CN8_2 U1.CN8_3 U1.CN8_4 U1.CN8_5 U1.CN8_6 U1.CN9_1 U1.CN9_2 U1.CN9_3 U1.CN9_4 U1.CN9_5 U1.CN9_6 U1.CN9_7 U1.CN9_8 U1.CN10_3 U1.CN10_5 U1.CN10_6 U1.CN10_7 U1.CN10_8 U1.CN10_9 U1.CN10_10 U1.CN10_12 U1.CN10_14 U1.CN10_16 U1.CN10_18 U1.CN10_20 U1.CN10_21 U1.CN10_23 U1.CN10_25 U1.CN10_26 U1.CN10_28 U1.CN10_30 U1.CN10_32 U1.CN10_33 U1.CN10_34 U1.CN10_35 U1.CN10_36 U1.CN10_37 U1.CN10_38

## Polygon pours and split planes (outlines as drawn)
GND on Top Layer "GND_L01_P000" (solid, pour order 0): 25.273,119.507 172.974,119.507 172.974,25.527 25.273,25.527
GND on Bottom Layer "GND_L02_P001" (solid, pour order 1): 25.4,119.38 173.101,119.38 173.101,25.4 172.974,25.527 25.4,25.527

## Keep-outs
Keep-Out Layer:
  the board outline again, w0.254

## Other copper
Top Layer:
  text "ARMA Group / The OAE Challenge / February 2023 - Shahrood University of Technology" at 34.036,109.601 h1

## Text inside footprints (layer, text, board x,y; h text height)
ALCD1: Top Overlay "LCD 16X2-A" at 55.118,100.33 h1.91 r270; Top Overlay "16" at 82.847,61.764 h1.27 r270; Top Overlay "1" at 82.847,99.356 h1.27 r270; Top Overlay "14" at 82.593,66.844 h1.27 r270